# Altium PCB PCB1.PcbDoc
Units mm, origin at the board's own origin, x right, y up, seen from the top; angles counter-clockwise.
Board outline 152.4 x 101.6 mm, 2 copper layers (Top Layer, Bottom Layer); 23 components, 26 nets, 101 pads, 0 vias.
Unrouted connection lines stored in the file: 3.
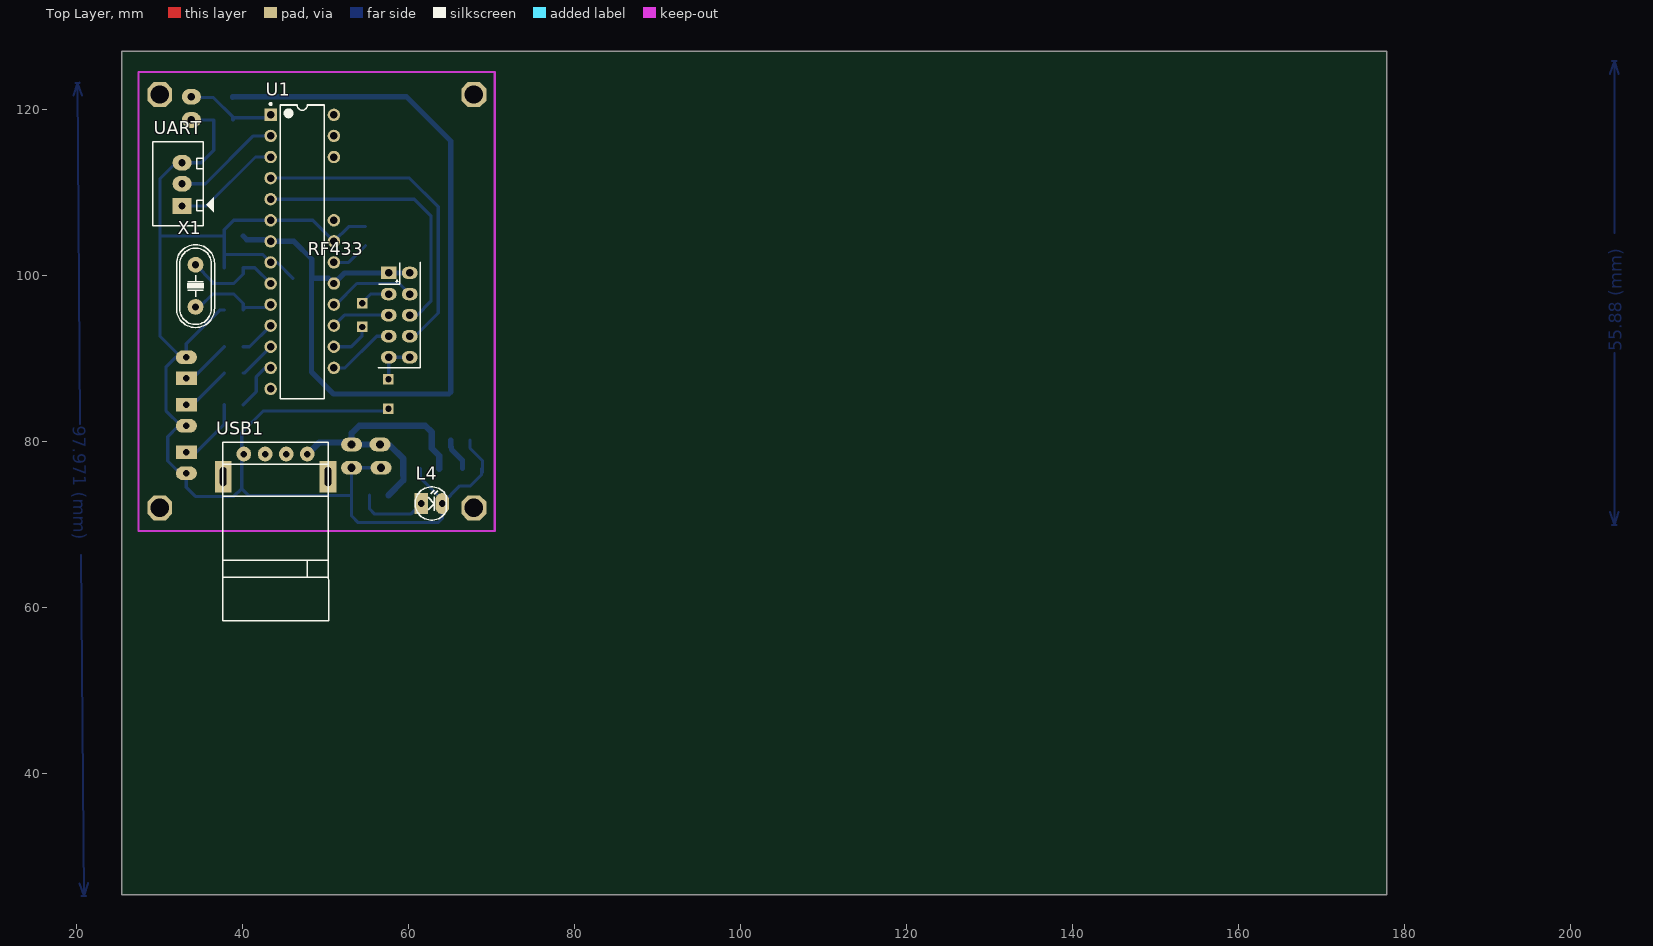
[diagram p0: Top Layer view]
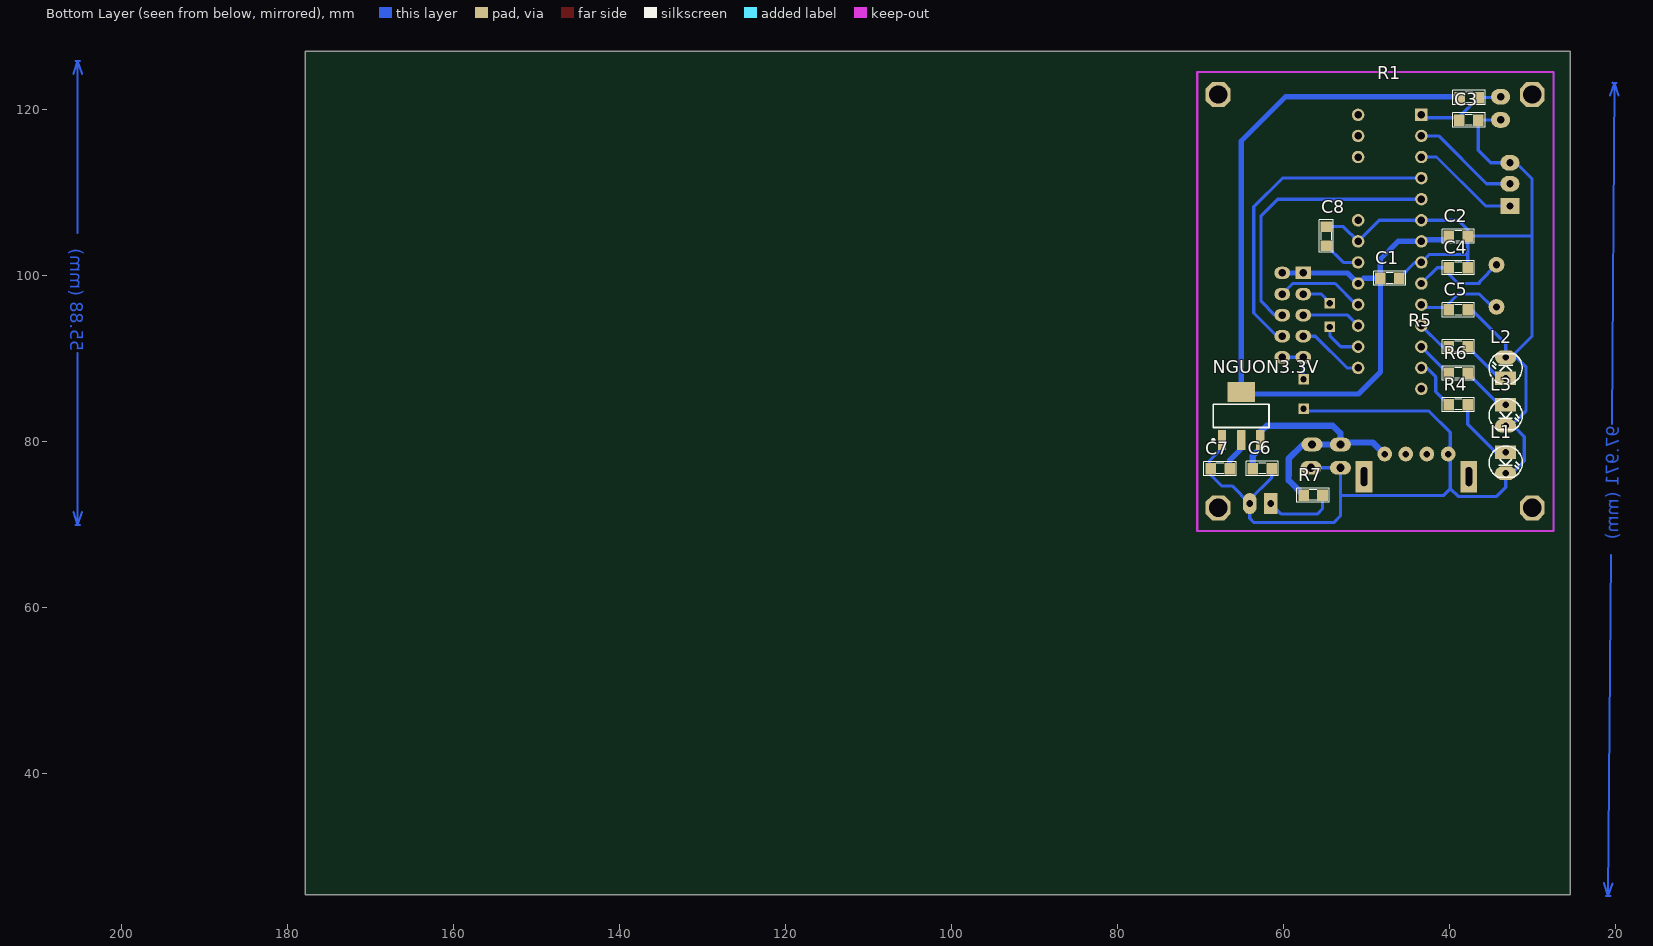
[diagram p1: Bottom Layer view, seen from below]
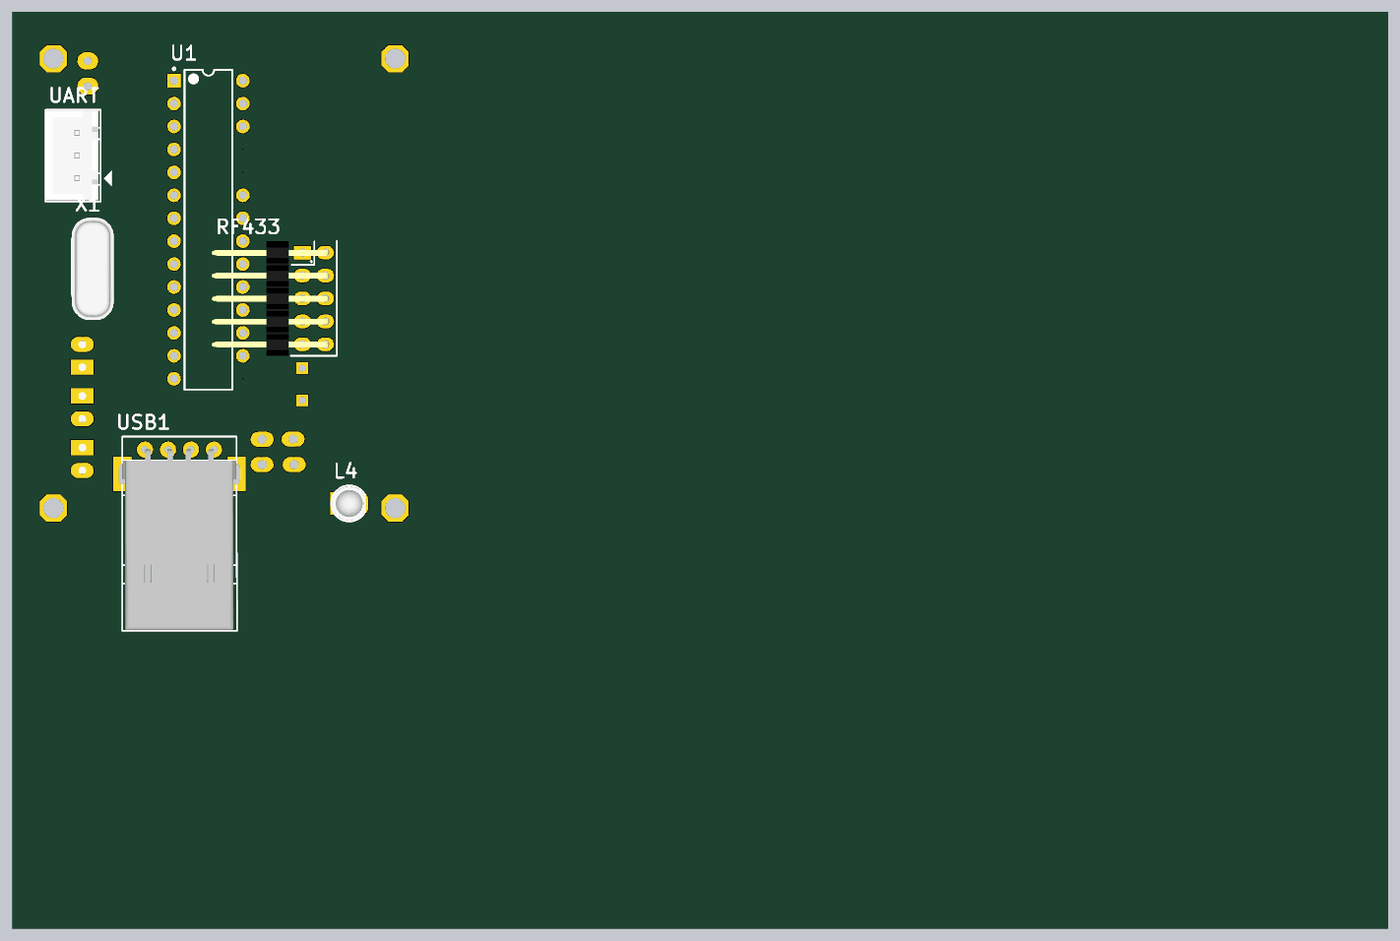
[diagram p2: 3D render of the assembled board from above, using the file's embedded part models]
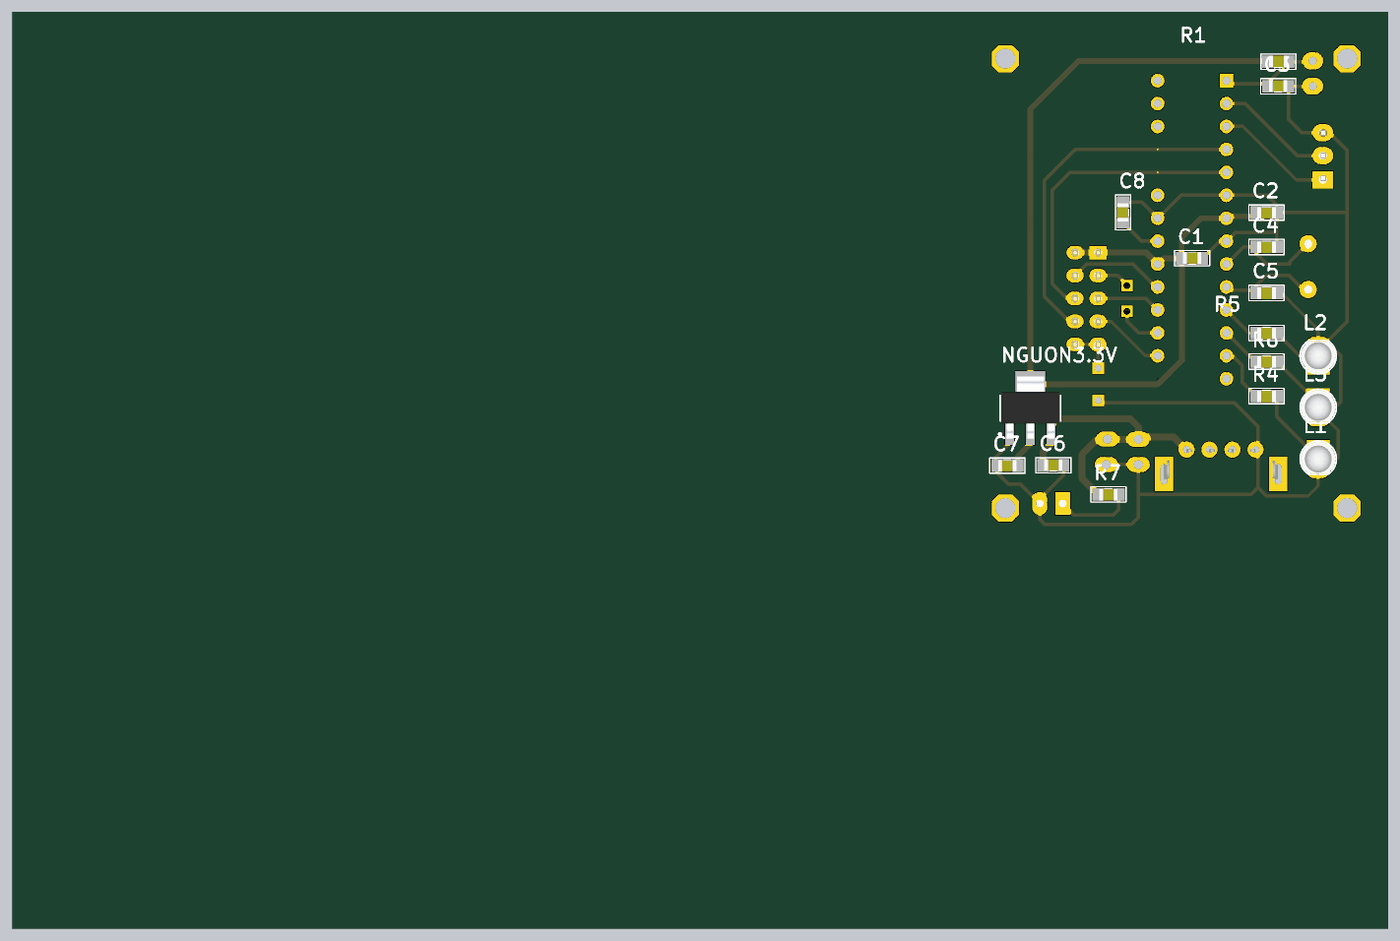
[diagram p3: 3D render of the assembled board from below, using the file's embedded part models]

## Layer stack, top to bottom
Top Solder: solder mask 0.0102, Solder Resist, Dk 3.5
Top Layer: signal copper 0.0356
Dielectric 1: dielectric 0.32, FR-4, Dk 4.8
Bottom Layer: signal copper 0.0356
Bottom Solder: solder mask 0.0102, Solder Resist, Dk 3.5

## Board outline
25.4,25.4 177.8,25.4 177.8,127 25.4,127

## Design rules (kind name [scope] priority, off if disabled: settings)
Clearance 3.31V [InNet('3.3V')] p1: gap=0.762
Clearance 51V [InNet('VCC')] p2: gap=1.016
Clearance [All] p3: gap=0.381
PolygonConnect [All] p1: connectstyle=Relief reliefconductorwidth=0.254 reliefentries=4 polygonreliefangle="90 Angle" airgapwidth=0.254
RoomDefinition RF433 [InComponentClass('RF433')] p1: confinementstyle=ConfineIn formatcopy=TRUE lockcomponents=FALSE outline 178.943,26.797 208.229,26.797 208.229,51.308 178.943,51.308
RoutingVias [All] p1: holewidth=0.711 width=1.27 viastyle="Through Hole" minholewidth=0.711 minwidth=1.27 maxholewidth=0.711 maxwidth=1.27
SolderMaskExpansion [All] p1: expansion=0.102
UnpouredPolygon [All] p1: allowunpoured=FALSE
Width 3.3V [InNet('3.3V')] p1: maxlimit=0.762 minlimit=0.508 preferedwidth=0.635
Width 5V [InNet('VCC')] p2: maxlimit=1.016 minlimit=0.508 preferedwidth=0.762
Width [All] p3: maxlimit=0.381 minlimit=0.127 preferedwidth=0.381
29 further rules are at their usual default settings.

## Components (designator, comment, footprint, x,y, rotation, side; value= is the part's Value field where it differs from the comment)
C1 "104" SM-0805 47.142,99.67 r0 bottom
C2 "104" SM-0805 38.887,104.75 r180 bottom
C3 "104" SM-0805 37.617,118.72 r0 bottom
C4 "104" SM-0805 38.887,100.94 r180 bottom
C5 "104" SM-0805 38.887,95.86 r180 bottom
C6 "103" SM-0805 62.509,76.733 r0 bottom
C7 "103" SM-0805 67.589,76.733 r180 bottom
C8 "104" SM-0805 54.762,104.75 r270 bottom
L1 "LED" LED-3 33.172,78.715 r270 bottom
L2 "LED" LED-3 33.172,87.605 r90 bottom
L3 "LED" LED-3 33.172,84.43 r270 bottom
L4 "LED" LED-3 61.468,72.517 r0 top
NGUON3.3V "LM1117" SOT223-4N 65.049,83.083 r90 bottom
R1 "10" SM-0805 37.592,121.437 r0 bottom
R4 "1k" SM-0805 38.887,84.43 r180 bottom
R5 "1k" SM-0805 38.887,91.415 r180 bottom
R6 "1k" SM-0805 38.887,88.24 r180 bottom
R7 "1k" SM-0805 56.388,73.533 r180 bottom
RF433 "Header 5x2" HED2X5_CEN 57.556,100.305 r270 top
U1 "ATmega8A-PU" 28P3 47.142,102.845 r0 top
UART "JP3" CON3 32.664,108.509 r90 top
USB1 "USB-S" USB-A 47.752,78.486 r180 top
X1 "4MHz" XT2 34.29,98.755 r90 top

## Footprints (in the part's own frame and the unit in brackets; to place one, negate y for a bottom-side part, rotate by r counter-clockwise, add the part's x,y. Pads: shape width x height; smd on the part's side, far side on the other; paste and mask are expansions set on the pad)
28P3 [mm] "DIP, 28-Leads, Row Spacing 7.62mm, Pitch 2.54mm, Body 34.67x7.3mm"
  rect 1.5x1.5 hole 0.9: 1(-3.81,16.51)
  round 1.5 hole 0.9: 2(-3.81,13.97) 3(-3.81,11.43) 4(-3.81,8.89) 5(-3.81,6.35) 6(-3.81,3.81) 7(-3.81,1.27) 8(-3.81,-1.27) 9(-3.81,-3.81) 10(-3.81,-6.35) 11(-3.81,-8.89) 12(-3.81,-11.43) 13(-3.81,-13.97) 14(-3.81,-16.51) 16(3.81,-13.97) 17(3.81,-11.43) 18(3.81,-8.89) 19(3.81,-6.35) 20(3.81,-3.81) 21(3.81,-1.27) 22(3.81,1.27) 23(3.81,3.81) 26(3.81,11.43) 27(3.81,13.97) 28(3.81,16.51)
  round 0 all layers, no hole: 15(3.81,-16.51) 24(3.81,6.35) 25(3.81,8.89)
  silkscreen extent -3.93,-17.7 2.65,17.93, body extent -3.6,-17.65 3.6,17.65, height 4.58
CON3 [mil] "CON 3"
  rect 75x90 hole 34: 1(-5,0)
  oval 75x90 hole 34: 2(100,0) 3(200,0)
  silkscreen extent -100,-150 300,140, body extent -95,-90 295,136, height 276
HED2X5_CEN [mm] "Connector; Header; 5x2 Position"
  rect 1.5x1.9 hole 0.9: 1(0,0)
  oval 1.5x1.9 hole 0.9: 2(2.54,0) 3(5.08,0) 4(7.62,0) 5(10.16,0) 6(0,2.54) 7(2.54,2.54) 8(5.08,2.54) 9(7.62,2.54) 10(10.16,2.54)
  silkscreen extent -1.27,-1.27 11.43,3.81, body extent -1.24,-10.02 11.46,2.86, height 5.02
LED-3 [mil] "LED 2 PIN, 3ly Only colour"
  rect 65x100 hole 32: 1(0,0)
  oval 65x100 hole 32: 2(100,0)
  silkscreen extent -29,-78 118,79, body extent -25,-75 113,75, height 217
SM-0805 [mil] "Compoment SMD 80x50mil"
  rect 50x55 smd: 1(-45,0) 2(45,0)
  silkscreen extent -77,-34 76,33, body extent -40,-27 40,23, height 24
SOT223-4N [mm] "SOT223, 4-Leads, Body 6.5x3.5mm, Pitch 2.3mm, Lead Span 7mm, IPC Medium Density"
  rect 2.4x1 smd: 1(-2.9,2.3) 2(-2.9,0) 3(-2.9,-2.3)
  rect 2.4x3.3 smd: 4(2.9,0)
  silkscreen extent -3.02,-3.35 1.4,3.48, body extent -3.39,-3.27 3.5,3.23, height 1.72
USB-A [mil]
  round 70 hole 31: 1(0,0) 2(100,0) 3(200,0) 4(301,0)
  rect 80x150 hole 31 slot 90 at 90 deg: 5(-98,107) 6(399,107)
  silkscreen extent -101,-57 401,790, body extent -97,0 399,784, height 177
XT2 [mil] "Footpin for Crystal 2 pin"
  round 75 hole 34: 1(-100,0) 2(100,0)
  silkscreen extent -198,-90 195,90, body extent -233,-93 213,90, height 138

## Part data
C1 C2 C3 C4 C5 C6 C7 C8: library part CM, "Cap SMD"
L1 L2 L3 L4: "LED Single colour Green and Red"
NGUON3.3V: "3v3"
R1 R4 R5 R6 R7: library part R, "Resistor 1/4W"
RF433: library part HED5x2
U1: "8-bit AVR Microcontroller, 8KB Flash, 512 Bytes EEPROM, 1KB SRAM, 28-pin PDIP, Industrial Grade (-40°C to 85°C)"
UART: library part Con3, "Connector 3"
USB1: library part USB_S, "USB connector"
X1: library part XT2, "Crystal For all Crystal 2pin."

## Free pads (board coordinates)
  oct 3x3 hole 2.2: 0(29.972,121.793) 1(67.818,121.793) 2(67.818,72.009) 3(29.972,72.009)
  oval 2.3x1.9 hole 0.9: 0(33.782,121.539) 1(33.782,118.745)
  oval 2.54x1.651 hole 1: 0(53.086,79.629) 0(56.515,79.645) 0(56.642,76.835) 1(53.086,76.835)
  rect 1.27x1.27 hole 0.762: 0(57.531,83.947) 2(57.531,87.503) 3(54.356,96.647) 4(54.356,93.802)

## Nets (pads, with @x,y where several pads share a name; then routed paths per layer and width w, separated by ;. In a path a pad name is that pad's centre, name@x,y a point inside that pad or via, vN(x,y) a via of type N, cw(c..) or ccw(c..) an arc to the next point about the centre after c; other vN are vias at no path point)
3.3V: C1.2 C2.1 C7.2 NGUON3.3V.2 NGUON3.3V.4 R1.2 RF433.1 RF433.6 U1.7 U1.20 | length 116.4
  Bottom Layer w0.635: R1.2 38.735,121.539 59.69,121.539 65.049,116.18 NGUON3.3V.4 64.791,85.725 50.927,85.725 48.26,88.392 48.26,99.644 C1.2 ; C2.1 40.462,104.318 43.129,104.318 U1.7 46.126,104.115 48.285,101.956 C1.2 ; RF433.6 RF433.1 52.222,100.305 U1.20 50.317,99.67 C1.2 ; NGUON3.3V.2 65.049,79.375 65.113,79.312 65.113,79.057 66.446,77.724 C7.2
AU: U1.14
BUT1: U1.23
BUT2: U1.25
CS: RF433.4 U1.16 | length 8.2
  Bottom Layer w0.381: U1.16 52.299,88.875 56.109,92.685 RF433.4
GDO0: RF433.9 U1.4 | length 39.4
  Bottom Layer w0.381: U1.4 60.071,111.735 63.525,108.28 63.525,95.479 60.731,92.685 RF433.9 RF433.9@60.477,92.685
GDO2: RF433.8 U1.5 | length 33.7
  Bottom Layer w0.381: U1.5 60.655,109.195 62.636,107.213 62.636,96.876 60.985,95.225 RF433.8
GND: C1.1 C2.2 C3.1 C4.2 C5.2 C6.1 C7.1 C8.1 L1.2 L2.2 L3.2 L4.2 NGUON3.3V.1 pad.0@56.642,76.835 pad.0@57.531,83.947 pad.1@33.782,118.745 pad.1@53.086,76.835 pad.2@57.531,87.503 RF433.5 RF433.10 U1.8 U1.22 UART.3 USB1.4 | length 198.1
  Bottom Layer w0.381: L3.2 L3.2@32.537,81.89 ; pad.1@33.807,118.72 C3.1 36.474,115.087 34.976,113.589 UART.3 31.928,113.589 29.997,111.658 29.997,104.623 ; C5.2 37.262,95.86 33.172,91.77 L2.2 L2.2@32.537,90.145 ; C4.2 37.744,102.527 ; C1.1 44.094,101.575 U1.8 42.38,102.527 37.744,102.527 ; 53.061,73.508 40.64,73.508 39.853,74.295 39.853,74.32 ; C8.1 52.73,105.893 U1.22 48.412,106.655 38.887,106.655 37.744,105.512 C2.2 ; pad.0@56.642,76.835 53.086,76.835 53.086,71.018 53.873,70.231 63.5,70.231 64.008,70.739 L4.2 ; pad.0@57.531,83.947 57.264,83.68 42.431,83.68 39.853,81.102 39.853,79.121 39.853,74.32 ; pad.2@57.531,87.503 57.556,87.528 RF433.5 RF433.10 ; C6.1 61.366,75.654 64.008,73.012 L4.2 ; NGUON3.3V.1 67.349,79.209 68.859,77.699 C7.1@68.859,76.276 ; C7.1 68.732,75.971 67.412,74.651 66.142,74.651 L4.2 ; 29.997,104.623 29.997,92.685 L2.2@32.537,90.145 ; 29.997,104.623 30.124,104.75 C2.2 ; L3.2@32.537,81.89 30.709,83.718 30.709,88.951 31.902,90.145 L2.2@32.537,90.145 ; L3.2@32.537,81.89 32.233,81.89 30.937,80.594 30.937,77.648 32.41,76.175 L1.2 33.172,74.473 34.265,73.381 38.913,73.381 39.853,74.32 ; 37.744,102.527 C2.2
LED1: R4.1 U1.13 | length 6.2
  Bottom Layer w0.381: R4.1 41.605,86.004 41.605,87.782 42.697,88.875 U1.13
LED2: R5.1 U1.11 | length 4.4
  Bottom Layer w0.381: R5.1 40.792,91.415 U1.11
LED3: R6.1 U1.12 | length 4.6
  Bottom Layer w0.381: R6.1 40.157,88.24 U1.12
MISO: RF433.3 U1.18 | length 7.1
  Bottom Layer w0.381: U1.18 52.222,95.225 RF433.3
MOSI: pad.3@54.356,96.647 pad.4 RF433.2 U1.17 | length 8.7
  Bottom Layer w0.381: U1.17 53.035,91.415 54.356,92.735 pad.4 ; pad.3@54.356,96.647 54.356,96.723 55.397,97.765 RF433.2
NC: 
NetC8_2: C8.2 U1.21 | length 4.7
  Bottom Layer w0.381: U1.21 52.73,101.575 C8.2
NetL1_1: L1.1 R4.2 | length 8.3
  Bottom Layer w0.381: L1.1 34.392,78.715 37.744,82.067 R4.2
NetL2_1: L2.1 R5.2 | length 6.2
  Bottom Layer w0.381: L2.1 33.934,87.605 R5.2
NetL3_1: L3.1 R6.2 | length 6.2
  Bottom Layer w0.381: L3.1 33.934,84.43 R6.2
NetL4_1: L4.1 R7.2 | length 8.7
  Bottom Layer w0.381: R7.2 55.245,71.882 55.88,71.247 60.198,71.247 L4.1
OSC1: C4.1 U1.9 X1.2 | length 12.1
  Bottom Layer w0.381: X1.2 36.322,99.263 36.322,99.035 38.887,99.035 40.03,100.178 C4.1 41.427,100.94 U1.9
OSC2: C5.1 U1.10 X1.1 | length 11.2
  Bottom Layer w0.381: X1.1 34.798,96.215 36.347,97.765 38.887,97.765 40.03,96.622 C5.1 40.31,96.139 42.977,96.139 U1.10
RESET: C3.2 pad.0@33.782,121.539 R1.1 U1.1 | length 11.1
  Bottom Layer w0.381: pad.0@33.884,121.437 R1.1 38.76,119.126 C3.2 39.04,118.999 42.977,118.999 U1.1
RX: U1.2 UART.2 | length 13.1
  Bottom Layer w0.381: UART.2 35.484,111.049 41.25,116.815 U1.2
SCK: RF433.7 U1.19 | length 10.7
  Bottom Layer w0.381: U1.19 51.179,96.495 53.719,99.035 58.826,99.035 RF433.7
TX: U1.3 UART.1 | length 13.1
  Bottom Layer w0.381: UART.1 35.611,108.382 41.504,114.275 U1.3
VCC: C6.2 NGUON3.3V.3 pad.0@53.086,79.629 pad.0@56.515,79.645 R7.1 USB1.1 | length 34.6
  Bottom Layer w0.762: USB1.1 47.777,78.486 49.174,79.883 52.832,79.883 pad.0@53.086,79.629 ; R7.1 59.334,75.336 59.334,75.889 59.309,75.914 59.309,77.953 57.76,79.502 56.658,79.502 56.515,79.645 56.499,79.629 pad.0@53.086,79.629 ; C6.2 63.652,78.264 62.749,79.167 NGUON3.3V.3 62.749,81.142 61.976,81.915 54,81.915 53.086,81.001 pad.0@53.086,79.629
pads on no net: U1.6 U1.15 U1.24 U1.26 U1.27 U1.28 USB1.2 USB1.3 USB1.5 USB1.6
copper on no net: | length 138.4
  Bottom Layer w0.254: 19.57,121.687 20.066,123.215 ; 19.812,123.213 20.32,123.217 ; 20.308,26.768 20.828,25.248 ; 20.386,82.128 20.066,123.215 ; 20.508,66.335 20.828,25.248 ; 20.574,25.246 21.082,25.25 ; 20.586,121.695 20.066,123.215 ; 21.324,26.776 20.828,25.248 ; 204.724,71.478 205.232,69.954 ; 204.724,124.31 205.232,125.834 ; 204.978,69.954 205.486,69.954 ; 204.978,125.834 205.486,125.834 ; 205.232,90.632 205.232,69.954 ; 205.232,105.156 205.232,125.834 ; 205.74,71.478 205.232,69.954 ; 205.74,124.31 205.232,125.834

## Polygon pours and split planes (outlines as drawn)
GND on Bottom Layer "Top Layer-No Net" (solid, remove dead copper, shelved, pour order 13): 70.333,124.511 70.333,69.24 27.534,69.24 27.407,69.367 27.407,124.536 70.307,124.536 70.333,124.511
GND on Bottom Layer "Top Layer-No Net" (solid, remove dead copper, shelved, pour order 14): 70.358,69.215 70.358,124.536 27.407,124.536 27.407,69.215

## Keep-outs
Keep-Out Layer:
  lines w0.254: 27.407,69.215 27.407,124.536 70.358,124.536 70.333,124.511 70.333,69.24 70.307,69.215 27.407,69.215

## Other copper
Bottom Layer:
  text "55.88 (mm)" at 206.146,90.886 h1.52 r90
  text "97.971 (mm)" at 19.473,81.867 h1.52 r270.45